# Altium PCB 30to50V-24V_10A.PcbDoc
Units mm, origin at the board's own origin, x right, y up, seen from the top; angles counter-clockwise.
Board outline 92.5 x 56.94 mm, 4 copper layers (TOP, GNG, GND, Bottom Layer), stack 1.571 mm thick; 49 components, 18 nets, 111 pads, 127 vias.
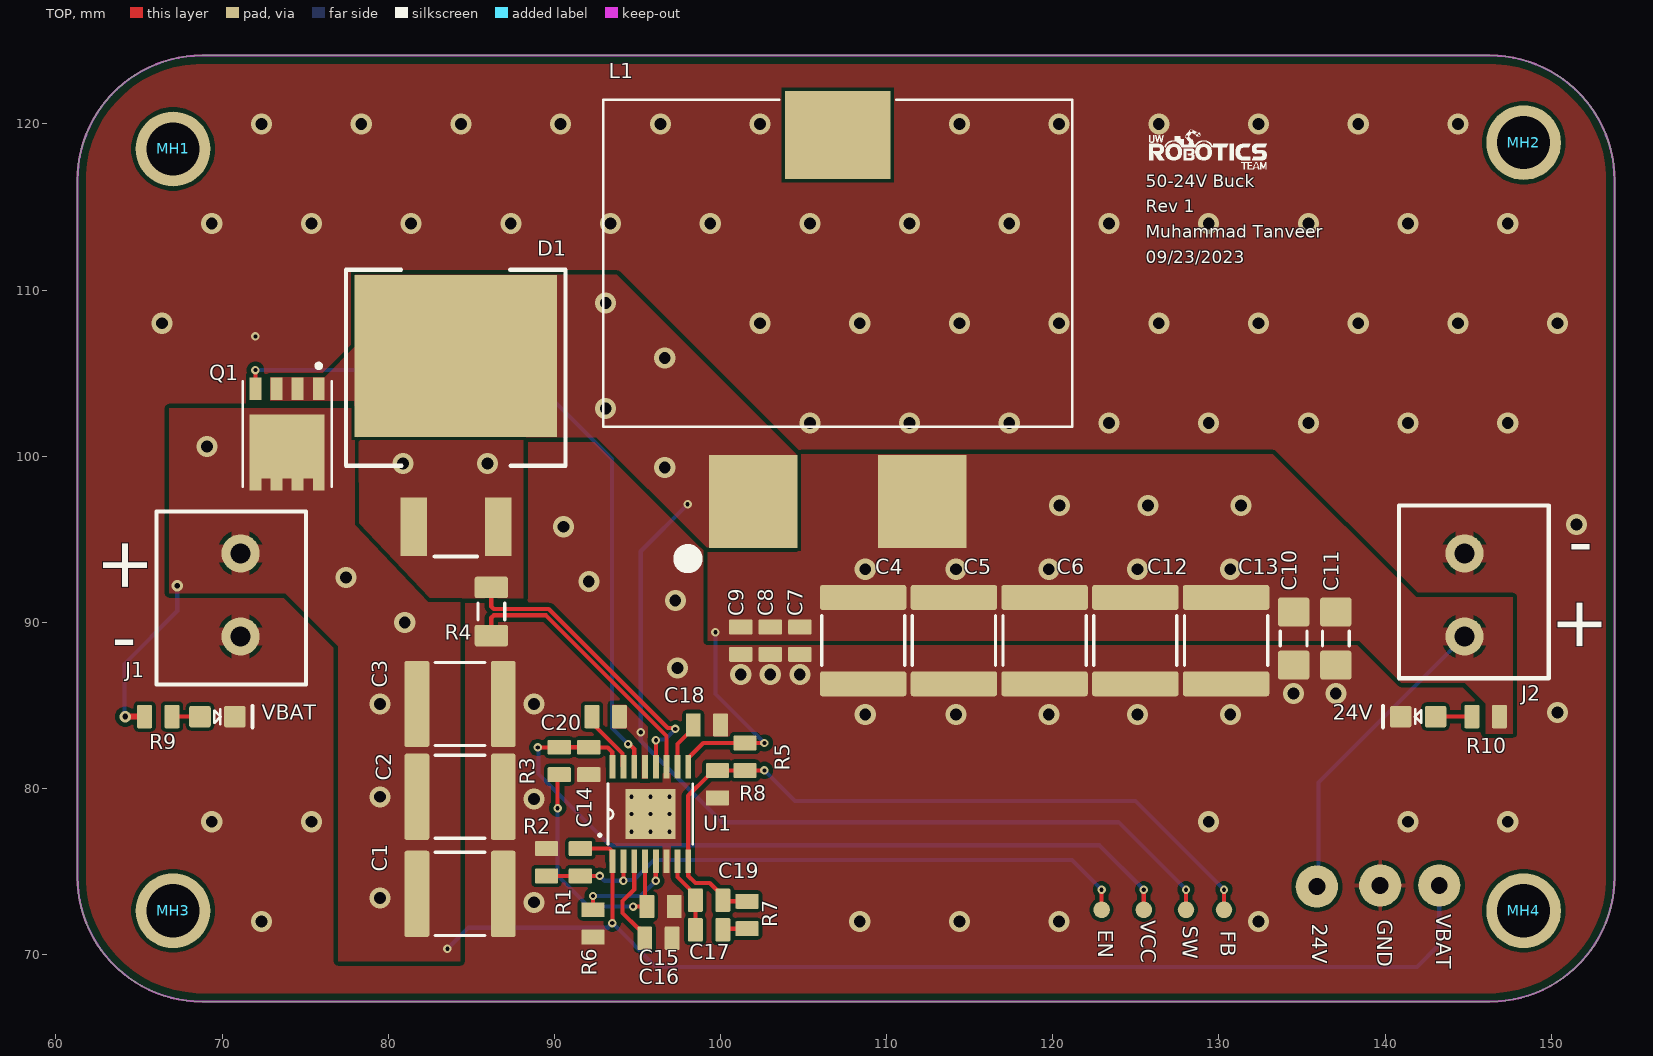
[diagram p0: TOP view]
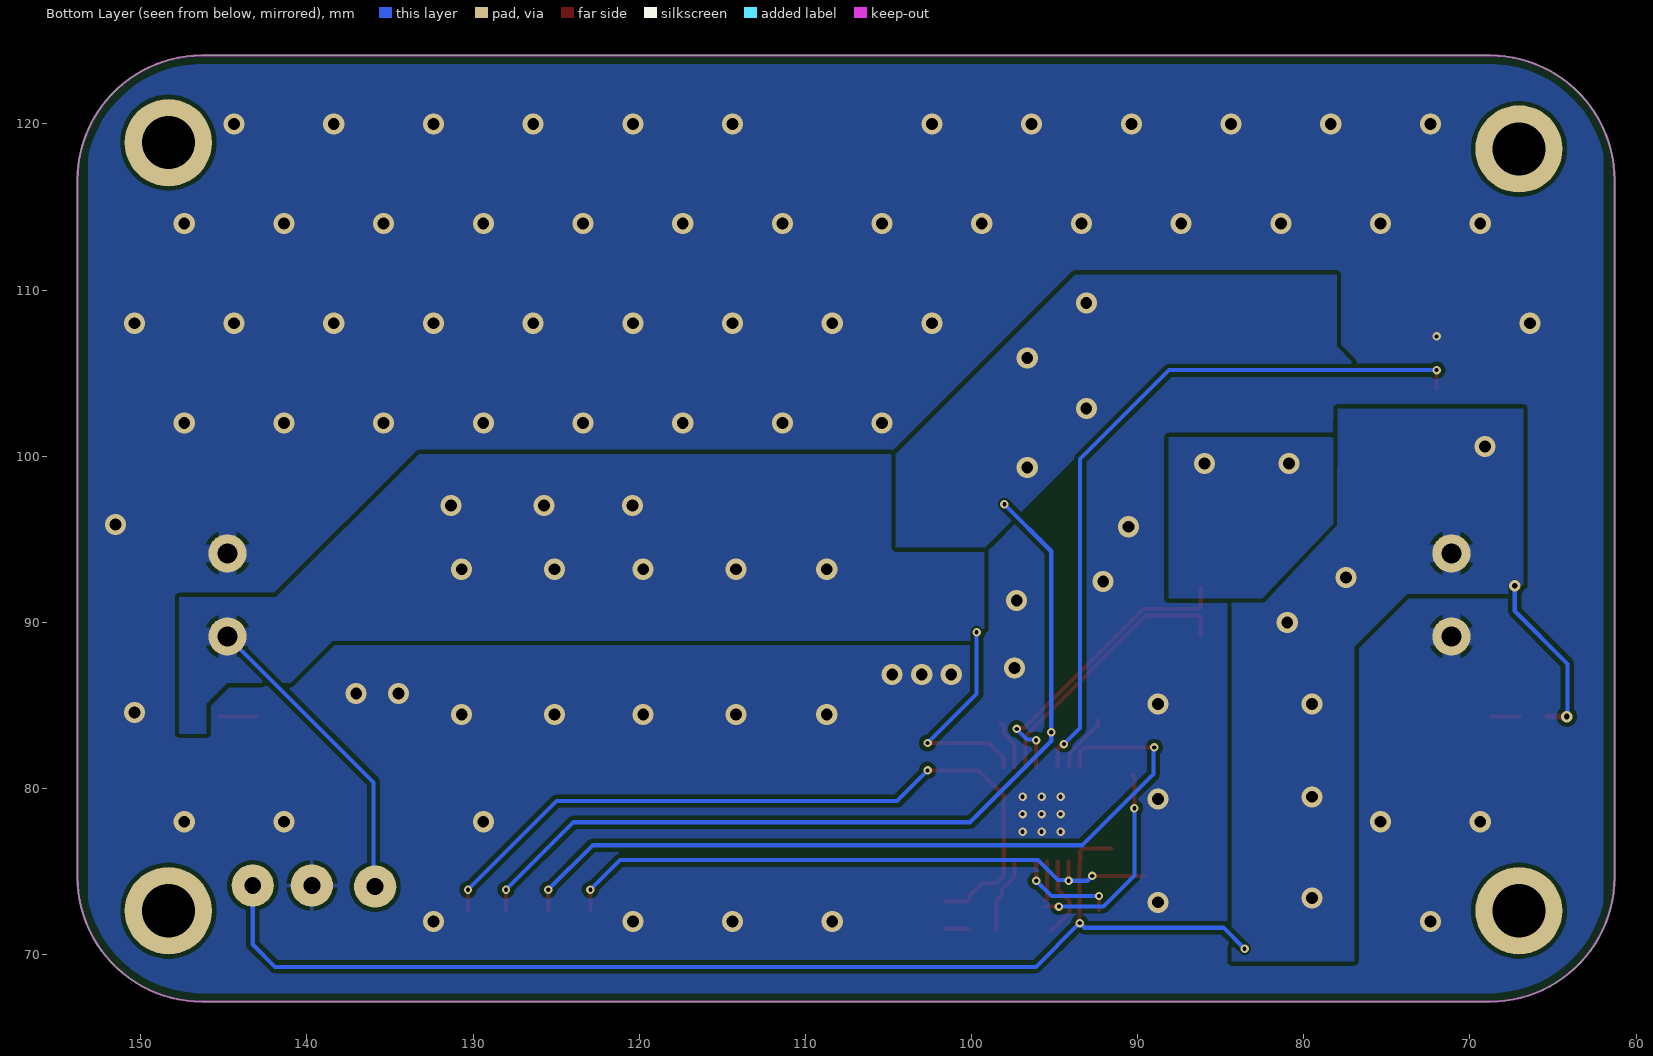
[diagram p1: Bottom Layer view, seen from below]
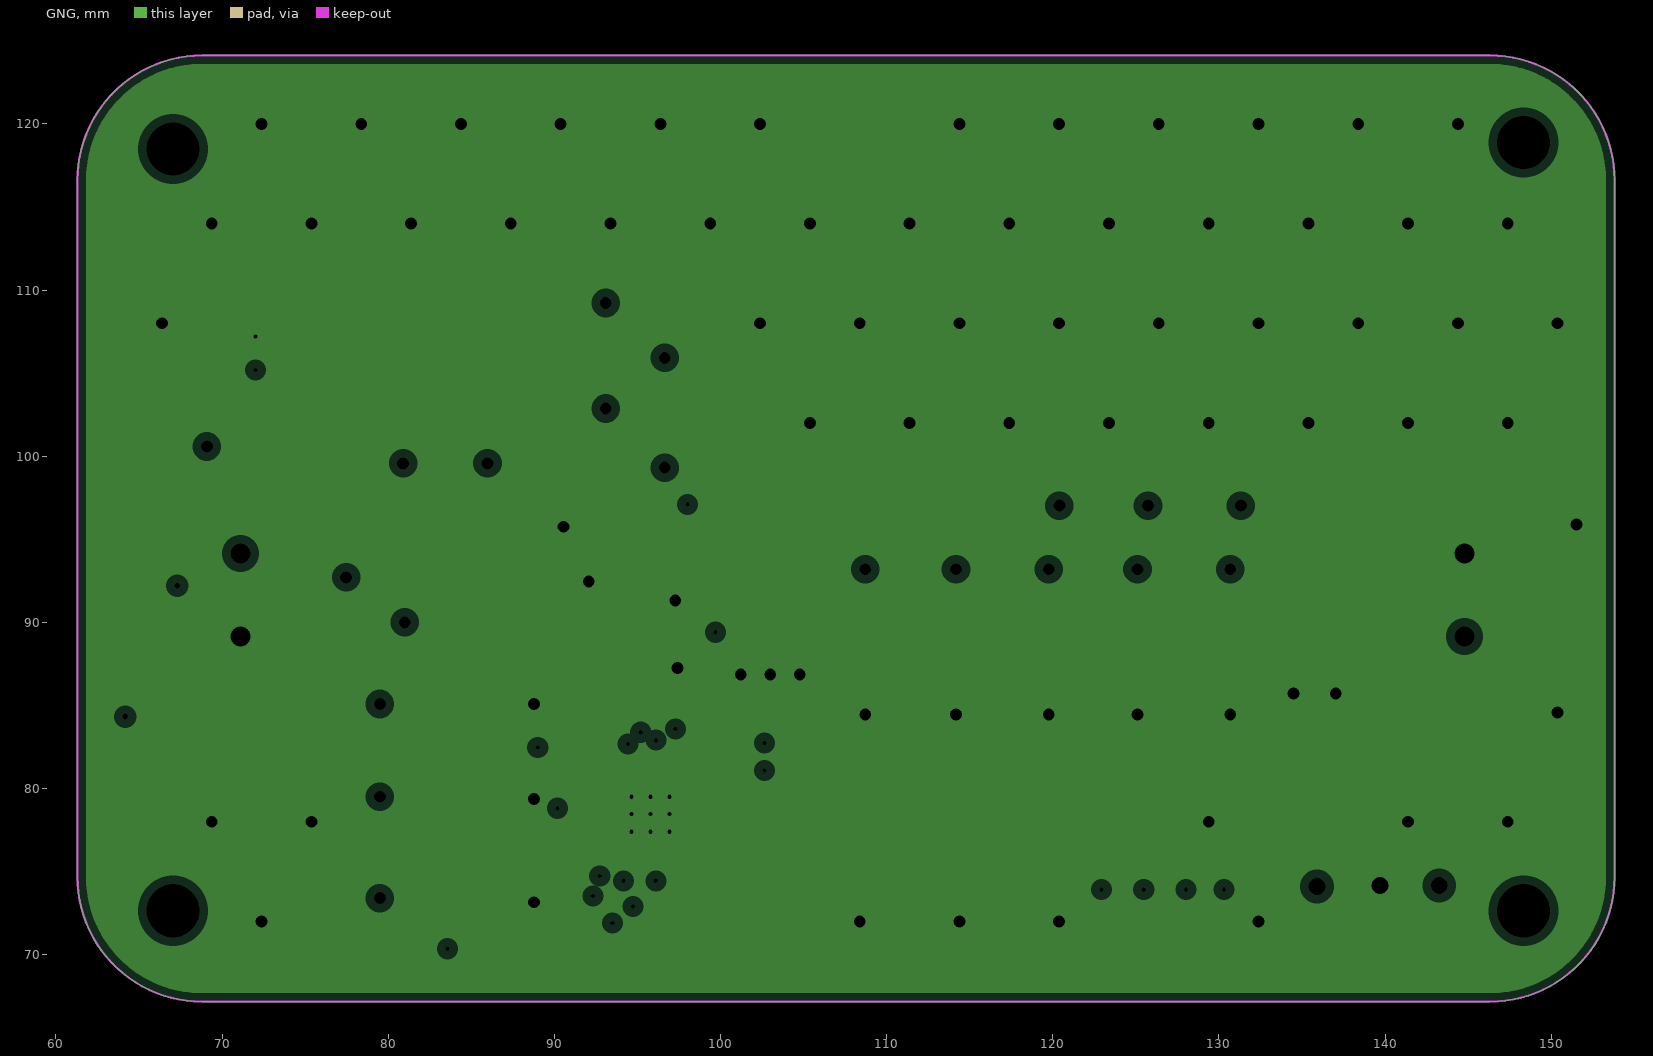
[diagram p2: GNG, clearances drawn from the general rule]
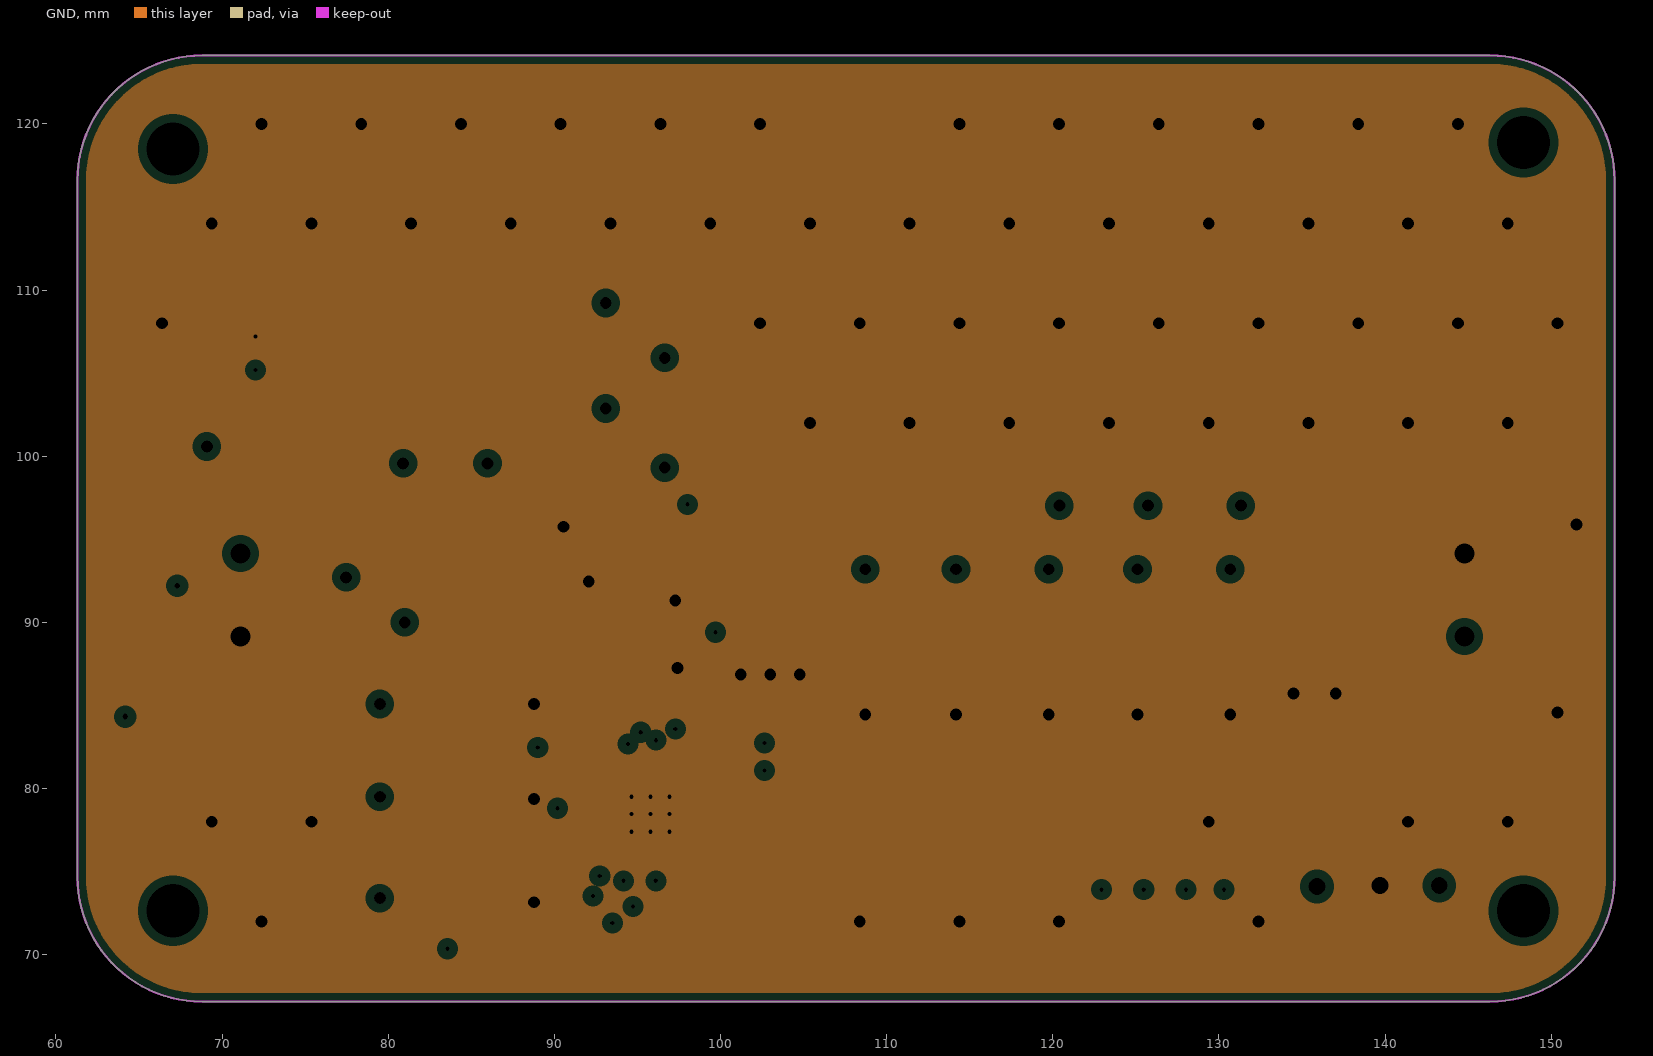
[diagram p3: GND, clearances drawn from the general rule]
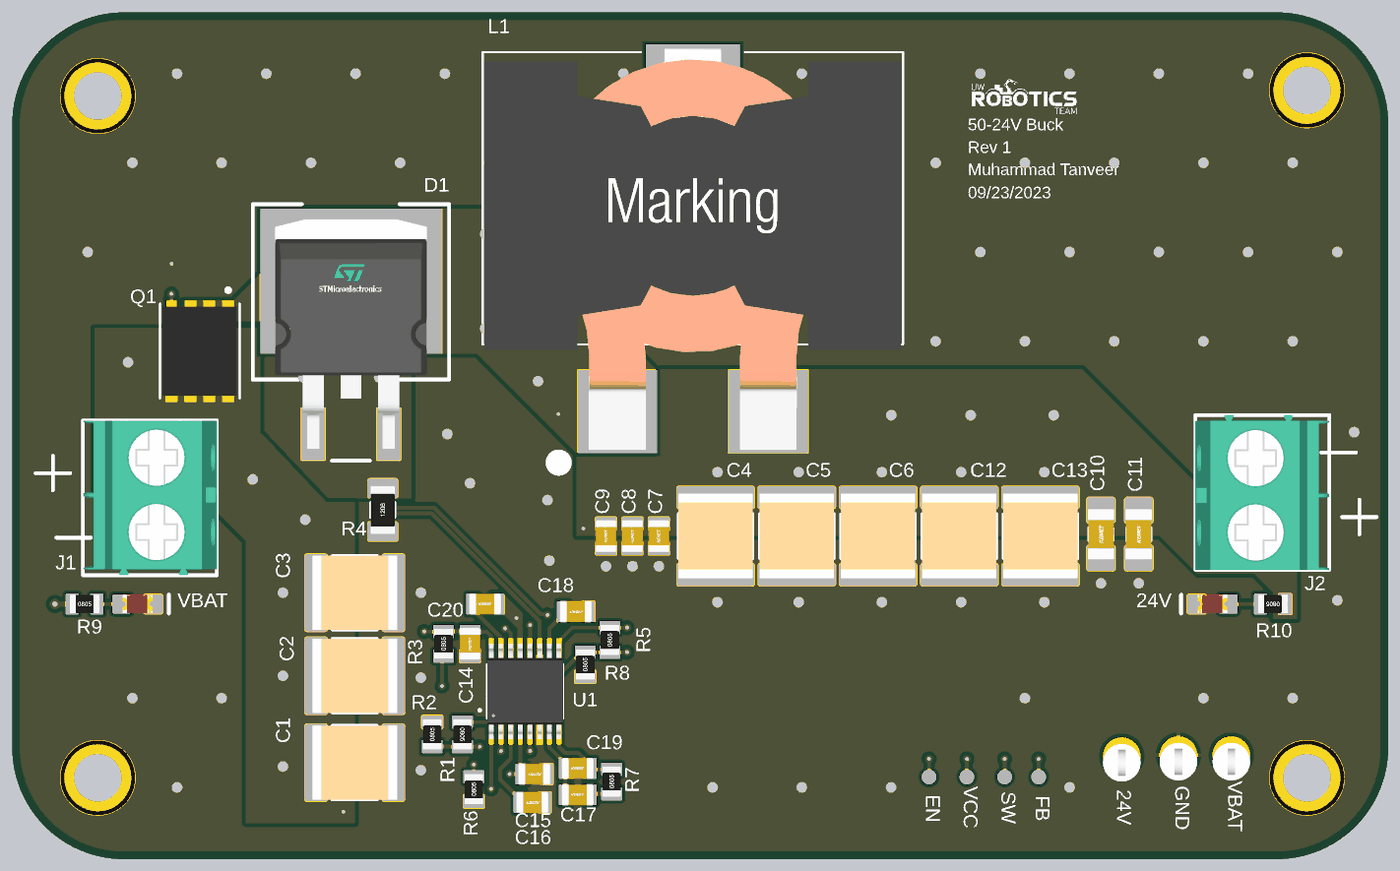
[diagram p4: 3D render of the assembled board from above, using the file's embedded part models]

## Layer stack, top to bottom
Top Solder: solder mask 0.0127, Solder Resist, Dk 3.8
TOP: signal copper 0.035
Dielectric 1: prepreg 0.2, PP-021, Dk 4.6
GNG: plane copper 0.018, net GND
Core: core 1.065, FR-4, Dk 4.6
GND: plane copper 0.018, net GND
Dielectric 2: prepreg 0.2, PP-021, Dk 4.6
Bottom Layer: signal copper 0.035
Bottom Solder: solder mask 0.0127, Solder Resist, Dk 3.8

## Board outline
68.803,67.176 cw(c68.803,74.676) 61.303,74.676 61.303,116.617 cw(c68.803,116.617) 68.803,124.117 146.304,124.117 cw(c146.304,116.617) 153.804,116.617 153.804,74.676 cw(c146.304,74.676) 146.304,67.176

## Design rules (kind name [scope] priority, off if disabled: settings)
BoardOutlineClearance [All] p1: gap=0.508 ignorepadtopadclearanceinfootprint=FALSE except(0.127: Text-OutlineEdge Text-CavityEdge Text-CutoutEdge Text-SplitBarrior Text-SplitContinuation; 0.635: Track-OutlineEdge Track-CavityEdge Track-CutoutEdge Track-SplitBarrior Track-SplitContinuation)
Clearance "High Voltage Internal" [InNetClass('High_Voltage_Internal')  and OnLayer('Power')] p1: gap=0.508 ignorepadtopadclearanceinfootprint=TRUE
Clearance "High Voltage External" [InNetClass('High_Voltage')  and OnLayer('Signal')] p2: gap=0.305 ignorepadtopadclearanceinfootprint=TRUE
Clearance Clearance_1 [All] p3: gap=0.254 ignorepadtopadclearanceinfootprint=TRUE except(0: Arc-Text Track-Text Text-Hole; 0.127: Track-Track SMDPad-SMDPad Text-Text; 0.178: SMDPad-Region; 0.203: Arc-Arc Arc-Track Arc-SMDPad Arc-Hole Track-SMDPad Track-Region Track-Hole SMDPad-THPad SMDPad-Fill SMDPad-Poly SMDPad-Text SMDPad-Hole THPad-Hole Via-Hole Fill-Hole Poly-Hole Region-Region Region-Hole; 0.508: THPad-THPad Via-Via)
ComponentClearance [All] p1: gap=0.254 collisioncheckmode=3 verticalgap=5.08 showdistances=FALSE
DiffPairsRouting [All] p1: maxlimit=0.254 minlimit=0.203 mostfreqgap=0.254 toplayer_minwidth=0.254 toplayer_maxwidth=0.254 toplayer_prefwidth=0.254 bottomlayer_minwidth=0.254 bottomlayer_maxwidth=0.254 bottomlayer_prefwidth=0.254 maxuncoupledlength=12.7
Height [All] p1: minheight=0 maxheight=1270 prefheight=12.7
HoleSize [All] p1: absolutevalues=TRUE maxlimit=5.08 minlimit=0.254 maxpercent=80.000 minpercent=20.000
HoleToHoleClearance [All] p1: gap=0.508 allowstackedmicrovias=TRUE
MinimumAnnularRing [All] p1: minimumring=0.127
MinimumSolderMaskSliver [All] p1: minsoldermaskwidth=0.076
PlaneClearance [All] p1: clearance=0.508
PlaneConnect PlaneConnect_highpwr [(InNet('24V') OR InNet('VBAT'))] p1: planeconnectstyle=Direct reliefexpansion=0.508 reliefentries=4 reliefconductorwidth=0.254 reliefairgap=0.254
PlaneConnect PlaneConnect_GNDCON [(InNet('GND') AND (InComponent('J1') OR InComponent('J2')))] p2: planeconnectstyle=Direct reliefexpansion=0.508 reliefentries=4 reliefconductorwidth=0.254 reliefairgap=0.254
PlaneConnect [All] p3: pad.planeconnectstyle=Relief pad.reliefexpansion=0.508 pad.reliefentries=4 pad.reliefconductorwidth=0.254 pad.reliefairgap=0.254 via.planeconnectstyle=Direct via.reliefexpansion=0.508 via.reliefentries=4 via.reliefconductorwidth=0.254 via.reliefairgap=0.254
PolygonConnect PolygonConnect_Via [IsVia] p1: connectstyle=Direct reliefconductorwidth=0.254 reliefentries=4 polygonreliefangle="90 Angle" airgapwidth=0.254
PolygonConnect [All] p2: connectstyle=Direct reliefconductorwidth=0.254 reliefentries=4 polygonreliefangle="90 Angle" airgapwidth=0.254
RoutingVias [All] p1: holewidth=0.305 width=0.61 viastyle="Through Hole" minholewidth=0.152 minwidth=0.305 maxholewidth=0.61 maxwidth=1.27
SilkToSilkClearance [All] p1: silktosilkclearance=0.051
SilkToSolderMaskClearance [IsPad] p1: minsilkscreentomaskgap=0.013 clearancetoexposedcopper=TRUE
SolderMaskExpansion [All] p1: expansion=0.051 istentingtop=FALSE
Width Width_1 [All] p1: maxlimit=2.54 minlimit=0.127 preferedwidth=0.254 minimp=50.000000 maximp=50.000000 favimp=50.000000
20 further rules are at their usual default settings.

## Classes and differential pairs
component class 30to50V-24V_10A: 24V C1 C2 C3 C4 C5 C6 C7 C8 C9 C10 C11 C12 C13 C14 C15 C16 C17 C18 C19 C20 D1 EN FB GND J1 J2 L1 MH1 MH2 MH3 MH4 Q1 R1 R2 R3 R4 R5 R6 R7 R8 R9 R10 SW VBAT VCC

## Components (designator, comment, footprint, x,y, rotation, side; value= is the part's Value field where it differs from the comment)
24V "TESTPOINT_LOOP" TESTPOINT_LOOP 135.89,73.66 r270 top (schematic designator TP3)
24V "LED_RED" LED_0805_RED 141.986,84.328 r180 top (schematic designator LED2)
C1 "CAP_10uF_50V_2220" CAP2220 84.328,73.66 r180 top value=10μF
C2 "CAP_10uF_50V_2220" CAP2220 84.328,79.502 r180 top value=10μF
C3 "CAP_10uF_50V_2220" CAP2220 84.328,85.09 r180 top value=10μF
C4 "CAP_47uF_35V_2220" CAP2220 108.585,88.9 r90 top value=47μF
C5 "CAP_47uF_35V_2220" CAP2220 114.046,88.9 r90 top value=47μF
C6 "CAP_47uF_35V_2220" CAP2220 119.507,88.9 r90 top value=47μF
C7 "CAP_0.1uF_50V_0805" CAP0805 104.775,88.9 r90 top value=0.1μF
C8 "CAP_1uF_50V_0805" CAP0805 102.997,88.9 r90 top value=1μF
C9 "CAP_4.7uF_50V_0805" CAP0805 101.219,88.9 r90 top value=4.7μF
C10 "CAP_NU_1206" CAP1206 134.493,89.027 r90 top value=NU
C11 "CAP_NU_1206" CAP1206 137.033,89.027 r90 top value=NU
C12 "CAP_NU_2220" CAP2220 124.968,88.9 r90 top value=NU
C13 "CAP_NU_2220" CAP2220 130.429,88.9 r90 top value=NU
C14 "CAP_1.5uF_50V_0805" CAP0805 92.075,81.661 r90 top value=1.5μF
C15 "CAP_1.8nF_50V_0805" CAP0805 96.393,72.898 r180 top value=1.8nF
C16 "CAP_10nF_16V_0805" CAP0805 96.266,70.993 r180 top value=10nF
C17 "CAP_1200pF_50V_0805" CAP0805 99.314,71.501 r0 top value=1200pF
C18 "CAP_10uF_16V_0805" CAP0805 99.187,83.82 r180 top value=10μF
C19 "CAP_47pF_50V_0805" CAP0805 99.314,73.279 r0 top value=47pF
C20 "CAP_150nF_50V_0805" CAP0805 93.091,84.328 r0 top value=150nF
D1 "DIO_SCHOTTKY_100V_20A" "D2PAK (TO-263AB) - STPS20M100SG-TR" 84.074,104.509 r0 top
EN "TESTPOINT_1MM_CIRCLE" TESTPOINT_CIRCLE_1MM 122.936,72.7 r180 top (schematic designator TP7)
FB "TESTPOINT_1MM_CIRCLE" TESTPOINT_CIRCLE_1MM 130.302,72.7 r0 top (schematic designator TP4)
GND "TESTPOINT_LOOP" TESTPOINT_LOOP 139.7,73.731 r270 top (schematic designator TP2)
J1 "CON_2POS_SCREW_TERM" 1935161 71.12,91.654 r270 top
J2 "CON_2POS_SCREW_TERM" 1935161 144.78,91.654 r90 top
L1 "IND_22uH_30A" 7443642200 107.056,111.617 r0 top
MH1 "MOUNTING_HOLE_M3_GIMBAL_REV2" MOUNTING_HOLE_3mm_GIMBAL_REV2#1 67.056,118.872 r0 top
MH2 "MOUNTING_HOLE_M3_GIMBAL_REV2" MOUNTING_HOLE_3mm_GIMBAL_REV2#2 148.336,118.872 r0 top
MH3 "MOUNTING_HOLE_M3_GIMBAL_REV2" MOUNTING_HOLE_3mm_GIMBAL_REV2#3 66.096,72.644 r0 top
MH4 "MOUNTING_HOLE_M3_GIMBAL_REV2" MOUNTING_HOLE_3mm_GIMBAL_REV2#4 148.336,73.152 r0 top
Q1 "NMOS_100V_100A" 8-VSON 73.914,101.346 r270 top
R1 "RES_49.9kΩ_0805_1%" RES0805 91.567,75.565 r270 top value=49.9kΩ
R2 "RES_2.08kΩ_0805_0.05%" RES0805 89.535,75.565 r90 top value=2.08kΩ
R3 "RES_76.8kΩ_0805_1%" RES0805 90.297,81.661 r90 top value=76.8kΩ
R4 "RES_0.007Ω_1206_1%" RES1206 86.208,90.653 r90 top value=7mΩ
R5 "RES_31.2KΩ_0805_0.1%" RES0805 101.473,81.915 r90 top value=31.2kΩ
R6 "RES_24.3kΩ_0805_1%" RES0805 92.329,71.882 r90 top value=24.3kΩ
R7 "RES_51kΩ_0805_5%" RES0805 101.6,72.39 r90 top value=51kΩ
R8 "RES_1.65KΩ_0805_0.1%" RES0805 99.822,80.264 r90 top value=1.65kΩ
R9 "RES_4.7kΩ_0805_5%" RES0805 66.167,84.328 r0 top value=4.7kΩ
R10 "RES_2.2kΩ_0805_5%" RES0805 146.05,84.328 r180 top value=2.2kΩ
SW "TESTPOINT_1MM_CIRCLE" TESTPOINT_CIRCLE_1MM 128.016,72.7 r270 top (schematic designator TP5)
U1 "LM5088" LM5088 95.783,78.461 r90 top
VBAT "TESTPOINT_LOOP" TESTPOINT_LOOP 143.256,73.731 r270 top (schematic designator TP1)
VBAT "LED_RED" LED_0805_RED 69.723,84.328 r0 top (schematic designator LED1)
VCC "TESTPOINT_1MM_CIRCLE" TESTPOINT_CIRCLE_1MM 125.476,72.7 r270 top (schematic designator TP6)

## Footprints (in the part's own frame and the unit in brackets; to place one, negate y for a bottom-side part, rotate by r counter-clockwise, add the part's x,y. Pads: shape width x height; smd on the part's side, far side on the other; paste and mask are expansions set on the pad)
8-VSON [mm]
  rect 1.372x0.71 smd paste-0.673: 1(-2.712,-1.905) 2(-2.712,1.905) 2(-2.712,-0.635) 2(-2.712,0.635) 3(2.712,1.905) 3(2.712,-0.635) 3(2.712,0.635) 3(2.712,-1.905)
  rect 3.85x4.52 smd paste-0.673: 3(0.762,0)
  silkscreen extent -4.17,-2.68 3.18,2.68, body extent -3,-2.5 3,2.5, height 1
1935161 [mm] "TERM BLK 2POS SIDE ENTRY 5MM PCB"
  round 2.3 hole 1.2: 1(-2.5,0) 2(2.5,0)
  silkscreen extent -5.01,-5.06 5.39,3.94, body extent -5.01,-5.06 5.39,3.94, height 11.41
7443642200 [mm]
  rect 5.33x5.59 smd: 1(-5.075,-14.335) 2(5.075,-14.335)
  rect 6.35x5.28 smd: 3(0,7.72)
  silkscreen extent -14.12,-17.9 14.12,9.83, body extent -14,-16.91 14,10.09, height 18.53
CAP0805 [mm] "Chip Capacitor, Body 2.0x1.2mm, Height 0.45mm, IPC Medium Density"
  rrect15% 0.9x1.4 smd: 1(-0.825,0) 2(0.825,0)
  body extent -1.1,-0.73 1.1,0.73, height 1.39
CAP1206 [mm] "Chip Capacitor, Body 3.2x1.6mm, Height 0.55mm, IPC Medium Density"
  rrect20% 1.75x1.9 smd: 1(-1.6,0) 2(1.6,0)
  silkscreen extent -0.45,-0.8 0.45,0.8, body extent -1.7,-0.9 1.7,0.9, height 0.88
CAP2220 [mm]
  rrect20% 1.5x5.2 smd: 1(-2.6,0) 2(2.6,0)
  silkscreen extent -1.5,-2.5 1.5,2.5, body extent -2.92,-2.5 2.92,2.5, height 2.4
"D2PAK (TO-263AB) - STPS20M100SG-TR" [mm] "TO-252AA"
  rect 1.6x3.5 smd: 1(-2.54,-8.751) 2(2.54,-8.751)
  rect 12.2x9.75 smd: 3(0,1.524)
  silkscreen extent -6.6,-10.54 6.6,6.71, body extent -5.1,-9.74 5.1,5.68, height 4.6
LED_0805_RED [mm] "SMD, 2-Leads, Body 2x1.25mm"
  rrect20% 1.3x1.3 smd: 1(-1.05,0) 2(1.05,0)
  silkscreen extent -0.18,-0.63 2.11,0.64, body extent -1,-0.62 1,0.63, height 1.12
LM5088 [mil]
  rect 56x14 smd paste-28: 1(-112,89.57) 2(-112,63.98) 3(-112,38.39) 4(-112,12.8) 5(-112,-12.8) 6(-112,-38.39) 7(-112,-63.98) 8(-112,-89.57) 9(112,-89.57) 10(112,-63.98) 11(112,-38.39) 12(112,-12.8) 13(112,12.8) 14(112,38.39) 15(112,63.98) 16(112,89.57)
  rect 118x118 smd paste-59: 17(0,0)
  silkscreen extent -72,-100 72,123, body extent -126,-101 126,101, height 43
MOUNTING_HOLE_3mm_GIMBAL_REV2#1 [mm] "3mm Hole"
  round 4.5 / inner round 4.5 / far side round 5.25 hole 3.2 mask+0.3: 0(0,-0.38)
MOUNTING_HOLE_3mm_GIMBAL_REV2#2 [mm] "3mm Hole"
  round 4.5 / inner round 4.5 / far side round 5.25 hole 3.2 mask+0.3: 0(0,0)
MOUNTING_HOLE_3mm_GIMBAL_REV2#3 [mm] "3mm Hole"
  round 4.5 / inner round 4.5 / far side round 5.25 hole 3.2 mask+0.3: 0(0.96,0)
MOUNTING_HOLE_3mm_GIMBAL_REV2#4 [mm] "3mm Hole"
  round 4.5 / inner round 4.5 / far side round 5.25 hole 3.2 mask+0.3: 0(0,-0.508)
RES0805 [mm] "Chip Resistor, 2-Leads, Body 2.00x1.25mm, IPC High Density"
  rrect15% 0.9x1.4 smd: 1(-0.825,0) 2(0.825,0)
  body extent -1,-0.62 1,0.63, height 0.61
RES1206 [mm] "Chip Resistor, Body 3.2x1.6mm, IPC Medium Density"
  rrect20% 1.3x2 smd: 1(-1.45,0) 2(1.45,0)
  silkscreen extent -0.5,-0.8 0.5,0.8, body extent -1.6,-0.8 1.6,0.8, height 0.61
TESTPOINT_CIRCLE_1MM [mm]
  round 1 smd: 1(0,0)
TESTPOINT_LOOP [mm]
  round 2.54 hole 1.02: 1(-0.437,0)
  body extent -1.27,-1.27 1.27,1.27, height 4.57

## Part data
24V GND VBAT: "TESTPOINT THRUHOLE", Manufacturer 1="Keystone Electronics", Manufacturer Part Number 1=5002, Package/Footprint=TH, Supplier Part Number 1=36-5002-ND, Mounting Type=TH, Supplier 1=Digi-Key
24V VBAT: "LED RED DIFFUSED 0805 SMD", Forward Voltage Drop=2V, Manufacturer 1=OSRAM, Manufacturer Part Number 1="LS R976-NR-1", Package/Footprint=0805, Supplier Part Number 1=475-1278-1-ND, Mounting Type=SMD, Supplier 1=Digi-Key
C1 C2 C3: "CAP CER 10UF 100V X7S 2220", Dielectric=X7S, Manufacturer 1="TDK Corporation", Manufacturer Part Number 1=C5750X7S2A106K230KB, Supplier Part Number 1=445-13408-1-ND, Voltage Rating=100V, Supplier 1=Digi-Key
C4 C5 C6: "CAP CER 47UF 35V X7R 2220", Manufacturer 1="TDK Corporation", Manufacturer Part Number 1=CGA9N1X7R1V476M230KC, Package/Footprint=2220, Supplier Part Number 1=445-CGA9N1X7R1V476M230KCCT-ND, Voltage Rating=35V, Mounting Type=SMD, Supplier 1=Digi-Key
C7: "CAP CER 0.1UF 50V X7R 0805", Dielectric=X7R, LCSC Part #=C49678, Manufacturer 1="Murata Electronics", Manufacturer Part Number 1=GCM21BR71H104KA37K, Package/Footprint=0805, Supplier Part Number 1=490-8049-1-ND, Voltage Rating=50V, Mounting Type=SMD, Supplier 1=Digi-Key
C8: "CAP CER 1UF 50V X7R 0805", LCSC Part #=C28323, Manufacturer 1="Samsung Electro-Mechanics", Manufacturer Part Number 1=CL21B105KBFNNNG, Package=0805, Supplier Part Number 1=1276-6470-1-ND, Voltage Rating=50V, Mounting Type=SMD, Supplier 1=Digi-Key
C9: "CAP CER 4.7UF 50V X5R 0805", Dielectric=X5R, LCSC Part #=C1779, Manufacturer 1="TDK Corporation", Manufacturer Part Number 1=CGA4J3X5R1H475K125AB, Package=0805, Supplier Part Number 1=445-7882-1-ND, Voltage Rating=50V, Mounting Type=SMD, Supplier 1=Digi-Key
C10 C11 C12 C13: "PLACEHOLDER CAPACITOR", Package=1206, Mounting Type="Surface Mount"
C14: "CAP CER 1.5UF 50V X7R 0805", Dielectric=X7R, Manufacturer 1="TDK Corporation", Manufacturer Part Number 1=C2012X7R1H155K125AC, Voltage Rating=50V, Supplier 1=Digi-Key, Supplier Part Number 1=C2012X7R1H155K125AC
C15: "CAP CER 1800PF 50V C0G/NP0 0805", Dielectric=C0G, Manufacturer 1="Murata Electronics", Manufacturer Part Number 1=GRM2165C1H182JA01D, Supplier Part Number 1=490-1626-1-ND, Voltage Rating=50V, Supplier 1=Digi-Key
C16: "CAP CER 10000PF 16V X7R 0805", Manufacturer 1=Yageo, Manufacturer Part Number 1=AC0805KRX7R7BB103, Supplier Part Number 1=311-3161-1-ND, Voltage Rating=16V, Supplier 1=Digi-Key
C17: "CAP CER 1200PF 50V X7R 0805", Manufacturer 1=KEMET, Manufacturer Part Number 1=C0805C122K5RAC7800, Package/Footprint=0805, Supplier Part Number 1=399-C0805C122K5RAC7800CT-ND, Voltage Rating=50V, Supplier 1=Digi-Key
C18: "CAP CER 10UF 16V X5R 0805", Dielectric=X5R, Manufacturer 1=Yageo, Manufacturer Part Number 1=CC0805KKX5R7BB106, Package/Footprint=0805, Supplier Part Number 1=311-1865-1-ND, Voltage Rating=16V, Mounting Type=SMD, Supplier 1=Digi-Key
C19: "CAP CER 47PF 50V C0G/NPO 0805", Dielectric=C0G, Manufacturer 1=YAGEO, Manufacturer Part Number 1=CC0805JRNPO9BN470, Package/Footprint=0805, Supplier Part Number 1=311-1107-1-ND, Voltage Rating=50V, Mounting Type=SMD, Supplier 1=Digi-Key
C20: "CAP CER 0.15UF 50V X7R 0805", Dielectric=X7R, Manufacturer 1="Murata Electronics", Manufacturer Part Number 1=CC0603KRX7R9BB154, Supplier Part Number 1=GRM21BR71H154KA01L, Voltage Rating=50V, Supplier 1=Digi-Key
D1: "DIODE SCHOTTKY 100V 20A D2PAK", Forward Current=20A, Manufacturer 1=STMicroelectronics, Manufacturer Part Number 1=STPS20M100SG-TR, Package/Footprint=TO-263AB, Supplier Part Number 1=497-10993-1-ND, Mounting Type=SMD, Supplier 1=Digi-Key, Vr (Max)=100V
EN FB SW VCC: "TESTPOINT 1MM CIRCLE"
J1 J2: "TERM BLK 2POS SIDE ENTRY 5MM", Manufacturer 1="Phoenix Contact", Manufacturer Part Number 1=1935161, Package/Footprint=SMD, Supplier Part Number 1=277-1667-ND, Mounting Type=TH, Supplier 1=Digi-Key
L1: "FIXED IND 22UH 30A 2.4 MOHM SMD", Current Rating=30A, DC Resistance (DCR)=2.4mR, Inductance=22μH, Inductance Tolerance=15%, Manufacturer 1="Würth Elektronik", Manufacturer Part Number 1=7443642200, Supplier Part Number 1=732-5628-ND, Mounting Type=SMD, Saturation Current=30A, Supplier 1=Digi-Key
MH1 MH2 MH3 MH4: "MOUNTING_HOLE_M3 Gimbal Rev2"
Q1: "MOSFET N-CH 100V 100A 8VSON", Manufacturer 1="Texas Instruments", Manufacturer Part Number 1=CSD19532Q5B, Package/Footprint=8-VSON-CLIP, Supplier Part Number 1=296-37478-1-ND, Id=100A, Mounting Type=SMD, Supplier 1=Digi-Key, Vdss=100V, Vgs (Max)=±20V
R1: "RES 49.9K OHM 1% 1/8W 0805", LCSC Part #=C17719, Manufacturer 1="Vishay Dale", Manufacturer Part Number 1=TNPW080549K9BEEN, Package/Footprint=0805, Supplier Part Number 1=541-3802-1-ND, Mounting Type=SMD, Supplier 1=Digi-Key
R2: "RES 2.08K OHM 0.05% 1/8W 0805", Manufacturer 1="KOA Speer Electronics, Inc.", Manufacturer Part Number 1=RN73R2ATTD2081A10, Package/Footprint=0805, Supplier Part Number 1=2019-RN73R2ATTD2081A10CT-ND, Mounting Type=SMD, Supplier 1=Digi-Key
R3: "RES 76.8K OHM 1% 1/8W 0805", Manufacturer 1=Yageo, Manufacturer Part Number 1=RC0805FR-0776K8L, Supplier Part Number 1=311-76.8KCRCT-ND, Supplier 1=Digi-Key
R4: "RES 0.007 OHM 1% 1W 1206", Manufacturer 1="Rohm Semiconductor", Manufacturer Part Number 1=PMR18EZPFU7L00, Package/Footprint=1206, Supplier Part Number 1=RHM.007ALCT-ND, Mounting Type=SMD, Supplier 1=Digi-Key
R5: "RES 31.2K OHM 0.1% 1/8W 0805", Manufacturer 1=Yageo, Manufacturer Part Number 1=RT0805BRD0731K2L, Package=0805, Supplier Part Number 1=13-RT0805BRD0731K2LCT-ND, Mounting Type=SMD, Supplier 1=Digi-Key
R6: "RES 24.3K OHM 1% 1/8W 0805", Manufacturer 1=YAGEO, Manufacturer Part Number 1=RC0805FR-0724K3L, Package=0805, Power=0.125W, Tolerance=1%, Supplier 1="Future Electronics"
R7: "RES 51K OHM 1% 1/8W 0805", Manufacturer 1="Vishay Dale", Manufacturer Part Number 1=CRCW080551K0FKEA, Supplier Part Number 1=541-51.0KCCT-ND, Supplier 1=Digi-Key
R8: "RES 1.65K OHM 0.1% 1/4W 0805", Manufacturer 1="KOA Speer Electronics, Inc.", Manufacturer Part Number 1=RS73F2ATTD1651B, Package=0805, Supplier Part Number 1=2019-RS73F2ATTD1651BCT-ND, Mounting Type=SMD, Supplier 1=Digi-Key
R9: "RES 4.7K OHM 5% 1/8W 0805", LCSC Part #=C17673, Manufacturer 1=Yageo, Manufacturer Part Number 1=RC0805JR-074K7L, Package=0805, Supplier Part Number 1=311-4.7KARCT-ND, Mounting Type=SMD, Supplier 1=Digi-Key
R10: "RES 2.2K OHM 5% 1/8W 0805", Manufacturer 1="Vishay Dale", Manufacturer Part Number 1=CRCW08052K20JNEAC, Package=0805, Supplier Part Number 1=541-4169-1-ND, Tolerance=5%, Supplier 1=Digi-Key
U1: library part LM5088MHX-2/NOPB, "IC REG CTRLR BUCK 16HTSSOP", Manufacturer 1="Texas Instruments", Package=16-HTSSOP, Supplier Part Number 1=296-35302-1-ND, Supply Voltage="4.5V - 75V", Switching Frequency="50kHz - 1MHz", Manufacturer Part Number 1=LM5088MHX-2/NOPB, Supplier 1=Digi-Key

## Via types
v1: diameter 1.27, hole 0.711, TOP to Bottom Layer, tented both sides, 93 vias
v2: diameter 0.508, hole 0.254, TOP to Bottom Layer, tented both sides, 32 vias
v3: diameter 0.7, hole 0.35, TOP to Bottom Layer, tented both sides, 2 vias

## Nets (pads, with @x,y where several pads share a name; then routed paths per layer and width w, separated by ;. In a path a pad name is that pad's centre, name@x,y a point inside that pad or via, vN(x,y) a via of type N, cw(c..) or ccw(c..) an arc to the next point about the centre after c; other vN are vias at no path point)
24V: 24V.1@135.89,74.097 C4.2 C5.2 C6.2 C7.2 C8.2 C9.2 C10.2 C11.2 C12.2 C13.2 J2.1 L1.2 R5.2 R10.1 U1.9 | length 32.4
  TOP w0.254: U1.9 98.058,81.839 98.96,82.74 R5.2@101.346,82.74 ; R5.2 v2(102.642,82.74)
  Bottom Layer w0.254: v2(99.695,89.408) 99.695,85.687 v2(102.642,82.74) ; 24V.1@135.992,73.66 135.992,80.366 J2.1
  other v1: 108.712,93.2 114.173,93.2 119.761,93.2 125.095,93.2 130.683,93.2 120.396,97.028 125.73,97.028 131.318,97.028
BOOT: C20.1 U1.15 | length 3.5
  TOP w0.254: C20.1@92.393,84.074 92.393,83.824 92.716,83.501 92.72,83.501 94.108,82.113 94.108,81.356 U1.15
COMP: C17.1 C19.1 U1.7 | length 4.6
  TOP w0.254: U1.7 97.408,74.677 98.166,73.919 98.166,73.602 C19.1 C17.1
CS: D1.1 D1.2 R4.2 U1.12 | length 18.3
  TOP w0.254: R4.2 86.208,90.954 86.356,90.805 89.662,90.805 96.827,83.64 97.233,83.64 v2(97.282,83.591) ; U1.12 96.112,81.309 v2(96.112,82.911)
  Bottom Layer w0.254: v2(96.112,82.911) 96.161,82.959 96.65,82.959 v2(97.282,83.591)
  other v1: 80.899,99.568 85.979,99.568
EN: EN.1 R1.2 R2.1 U1.2 | length 37.2
  TOP w0.254: R2.1 R1.2 v2(92.736,74.74) ; v2(94.158,74.447) U1.2 ; EN.1 v2(122.936,73.914)
  Bottom Layer w0.254: v2(92.736,74.74) 93.028,74.447 v2(94.158,74.447) 94.201,74.489 94.793,74.489 95.996,75.692 121.158,75.692 v2(122.936,73.914)
FB: C19.2 FB.1 R5.1 R7.2 R8.2 U1.8 | length 46.1
  TOP w0.254: U1.8@98.058,75.582 98.058,74.742 98.491,74.309 99.356,74.309 99.814,73.852 99.816,73.852 100.139,73.529 C19.2 100.203,73.215 R7.2 ; U1.8 98.058,79.571 99.249,80.761 99.249,80.766 99.572,81.089 R8.2 R5.1@101.345,81.09 ; R5.1 v2(102.642,81.09) ; FB.1 v2(130.302,73.914)
  Bottom Layer w0.254: v2(102.642,81.09) 104.484,79.248 124.968,79.248 v2(130.302,73.914)
GND: 24V.2 C1.1 C2.1 C3.1 C4.1 C5.1 C6.1 C7.1 C8.1 C9.1 C10.1 C11.1 C12.1 C13.1 C14.1 C15.1 C16.1 C18.1 GND.1 J1.2 J2.2 R2.2 R4.1 R6.1 R8.1 U1.6 U1.11 U1.17 VBAT.2 | length 16.6
  TOP w0.254: R4.1 86.208,90.275 86.356,90.424 89.504,90.424 96.758,83.17 U1.11
  other v1: 72.381,72 108.381,72 114.381,72 120.381,72 132.381,72 88.773,73.152 69.381,78 75.381,78 129.381,78 141.381,78 147.381,78 88.773,79.375 108.712,84.455 114.173,84.455 119.761,84.455 125.095,84.455 130.683,84.455 150.381,84.582 88.773,85.09 134.493,85.725 137.033,85.725 101.219,86.868 102.997,86.868 104.775,86.868 97.409,87.249 97.282,91.313 92.075,92.456 90.551,95.758 151.511,95.885 105.381,102 111.381,102 117.381,102 123.381,102 129.381,102 135.381,102 141.381,102 147.381,102 66.381,108 102.381,108 108.381,108 114.381,108 120.381,108 126.381,108 132.381,108 138.381,108 144.381,108 150.381,108 69.381,114 75.381,114 81.381,114 87.381,114 93.381,114 99.381,114 105.381,114 111.381,114 117.381,114 123.381,114 129.381,114 135.381,114 141.381,114 147.381,114 72.381,120 78.381,120 84.381,120 90.381,120 96.381,120 102.381,120 114.381,120 120.381,120 126.381,120 132.381,120 138.381,120 144.381,120
  other v2: 94.64,77.394 95.783,77.394 96.926,77.394 94.64,78.461 95.783,78.461 96.926,78.461 94.64,79.502 95.783,79.502 96.926,79.502 72.009,107.213
HG: Q1.1 U1.14 | length 43.9
  TOP w0.254: Q1.1 v2(72.009,105.181) ; v2(94.441,82.678) 94.508,82.678 94.808,82.378 U1.14
  Bottom Layer w0.254: v2(72.009,105.181) 88.113,105.181 93.472,99.822 93.472,83.647 v2(94.441,82.678)
NetC17_2: C17.2 R7.1 | length 1.5
  TOP w0.254: C17.2 100.203,71.565 R7.1
NetLED1_1: R9.2 VBAT.1@68.673,84.328 | length 1.7
  TOP w0.254: R9.2 VBAT.1@68.673,84.328
NetLED2_1: 24V.1@143.036,84.328 R10.2 | length 2.2
  TOP w0.254: 24V.1@143.036,84.328 R10.2
RAMP: C15.2 R3.1 U1.4 | length 14.6
  TOP w0.254: v2(90.196,78.816) 90.196,80.735 R3.1 ; v2(94.742,72.898) C15.2 ; C15.2@95.458,73.296 U1.4 ; C15.2@95.568,73.279 C15.2@95.585,73.296
  Bottom Layer w0.254: v2(90.196,78.816) 90.196,74.768 92.066,72.898 v2(94.742,72.898)
RES: C18.2 U1.10 | length 3
  TOP w0.254: U1.10 97.408,82.676 98.038,83.306 98.038,83.751 C18.2@98.234,83.947
RT: R6.2 U1.5 | length 6.2
  TOP w0.254: R6.2 v2(92.329,73.533) ; v2(96.108,74.447) U1.5
  Bottom Layer w0.254: v2(92.329,73.533) 95.194,73.533 v2(96.108,74.447)
SS: C16.2 U1.3 | length 5
  TOP w0.254: U1.3 94.808,73.929 94.107,73.227 94.107,72.517 95.058,71.566 95.118,71.566 C16.2@95.248,71.436
SW: C20.2 D1.3 L1.1 Q1.2 SW.1 U1.13 | length 53.2
  TOP w0.254: SW.1 v2(128.016,73.914)
  Bottom Layer w0.254: v2(98.019,97.104) 95.199,94.285 95.199,82.855 100.076,77.978 123.952,77.978 v2(128.016,73.914)
  other v1: 96.647,99.314 93.091,102.87 96.647,105.918 93.091,109.22
  other v2: 95.199,83.388
VBAT: C1.2 C2.2 C3.2 J1.1 Q1.3 R1.1 R9.1 U1.1 VBAT.1@143.256,74.168 | length 82
  TOP w0.254: R1.1 93.307,76.39 93.458,76.24 93.458,75.667 U1.1 93.508,71.918 v2(93.49,71.9)
  TOP w0.356: v3(64.173,84.328) R9.1 ; J1.1@71.097,94.13 J1.1
  Bottom Layer w0.254: v3@64.135,84.252 64.135,87.503 67.31,90.678 v3(67.31,92.202) ; J1.1@71.109,94.143 J1.1 ; v2(83.566,70.358) 84.836,71.628 93.214,71.628 93.487,71.9 v2(93.49,71.9) 96.125,69.266 141.91,69.266 143.256,70.612 VBAT.1@143.256,73.787
  other v1: 79.502,73.406 79.502,79.502 79.502,85.09 81,90 77.47,92.71 69.088,100.584
VCC: C14.2 R3.2 U1.16 VCC.1 | length 47.7
  TOP w0.254: v2(89.002,82.474) 90.285,82.474 R3.2 C14.2 92.094,82.467 93.214,82.467 93.482,82.199 93.482,81.332 U1.16 ; VCC.1 v2(125.476,73.914)
  Bottom Layer w0.254: v2(89.002,82.474) 89.05,82.425 89.05,80.876 93.345,76.581 122.809,76.581 v2(125.476,73.914)
pads on no net: L1.3 MH1.0 MH2.0 MH3.0 MH4.0

## Polygon pours and split planes (outlines as drawn)
GND on Bottom Layer "GND_L04_P023" (solid, remove dead copper, pour order 23): 61.976,123.698 153.162,123.698 153.162,67.564 62.992,67.564 61.976,68.58 61.976,100.584
24V on Bottom Layer "TOP-OUT" (solid, remove dead copper, pour order 18): 133.248,100.127 104.623,100.127 104.623,94.234 99.238,94.234 99.238,88.9 138.43,88.9 140.97,86.36 144.78,86.36 146.05,85.09 146.05,83.312 147.676,83.312 147.676,91.516 141.859,91.516
VBAT on Bottom Layer "TOP-VBAT" (solid, remove dead copper, pour order 10): 66.802,91.719 73.787,91.719 76.962,88.544 76.962,69.596 84.328,69.596 84.328,89.125 84.328,91.186 82.39,91.186 82.385,91.181 77.978,95.845 77.953,102.87 66.802,102.87
SW on Bottom Layer "SW_L04_P008" (solid, remove dead copper, pour order 8): 93.771,110.922 104.572,100.127 104.572,94.513 99.162,94.513 98.806,94.869 92.532,101.143 77.978,101.143 77.978,103.353 72.898,103.353 72.898,104.75 76.175,104.75 78.029,106.604 78.029,110.922
CS on Bottom Layer "TOP-CS" (solid, remove dead copper, pour order 15): 78.003,95.707 82.271,91.44 88.138,91.44 88.138,101.143 78.003,101.143
GND on TOP "GND_L01_P029" (solid, remove dead copper, pour order 29): 61.303,124.117 153.804,124.117 153.804,67.176 63.38,67.176 61.303,69.253
24V on TOP "TOP-OUT" (solid, pour order 28): 133.248,100.127 104.623,100.127 104.623,94.234 99.238,94.234 99.238,88.9 138.43,88.9 140.97,86.36 144.78,86.36 146.05,85.09 146.05,83.312 147.676,83.312 147.676,91.516 141.859,91.516
VBAT on TOP "TOP-VBAT" (solid, pour order 25): 66.825,91.743 73.81,91.743 76.985,88.568 76.985,69.596 84.351,69.596 84.351,89.148 84.351,91.209 82.413,91.209 82.408,91.205 78.001,95.868 77.976,102.893 66.825,102.893
SW on TOP "SW_L01_P027" (solid, remove dead copper, pour order 27): 93.771,110.922 104.572,100.127 104.572,94.513 99.162,94.513 98.806,94.869 92.532,101.143 77.978,101.143 77.978,103.353 72.898,103.353 72.898,104.75 76.175,104.75 78.029,106.604 78.029,110.922
CS on TOP "TOP-CS" (solid, pour order 26): 78.003,95.707 82.271,91.44 88.138,91.44 88.138,101.143 78.003,101.143
SW on TOP "SW_L01_P021" (solid, pour order 21): 93.472,85.039 93.472,83.617 94.336,83.617 95.275,82.677 95.275,80.594 95.631,80.594 95.631,83.718 94.31,85.039
GND on GND (split plane): 146.67,123.599 147.035,123.57 147.398,123.522 147.758,123.456 148.114,123.37 148.465,123.266 148.81,123.144 149.148,123.004 149.478,122.846 149.8,122.672 150.112,122.481 150.414,122.273 150.704,122.05 150.982,121.813 151.248,121.561 151.5,121.295 151.738,121.017 151.961,120.726 152.168,120.425 152.359,120.113 152.534,119.791 152.691,119.461 152.831,119.122 152.954,118.777 153.058,118.426 153.143,118.07 153.21,117.71 153.258,117.348 153.286,116.983 153.295,116.635 153.294,116.617 153.294,74.676 153.295,74.657 153.286,74.31 153.258,73.945 153.21,73.582 153.143,73.222 153.058,72.866 152.954,72.515 152.831,72.17 152.691,71.832 152.534,71.502 152.359,71.18 152.168,70.868 151.961,70.566 151.738,70.276 151.5,69.998 151.248,69.732 150.982,69.48 150.704,69.242 150.414,69.019 150.112,68.812 149.8,68.621 149.478,68.446 149.148,68.289 148.81,68.149 148.465,68.026 148.114,67.922 147.758,67.837 147.398,67.77 147.035,67.722 146.67,67.694 146.323,67.685 146.304,67.686 68.803,67.686 68.785,67.685 68.437,67.694 68.072,67.722 67.71,67.77 67.35,67.837 66.994,67.922 66.643,68.026 66.298,68.149 65.959,68.289 65.629,68.446 65.307,68.621 64.995,68.812 64.694,69.019 64.403,69.242 64.125,69.48 63.859,69.732 63.607,69.998 63.37,70.276 63.147,70.566 62.939,70.868 62.748,71.18 62.574,71.502 62.416,71.832 62.276,72.17 62.154,72.515 62.05,72.866 61.964,73.222 61.898,73.582 61.85,73.945 61.821,74.31 61.812,74.657 61.814,74.676 61.814,116.617 61.812,116.635 61.821,116.983 61.85,117.348 61.898,117.71 61.964,118.07 62.05,118.426 62.154,118.777 62.276,119.122 62.416,119.461 62.574,119.791 62.748,120.113 62.939,120.425 63.147,120.726 63.37,121.017 63.607,121.295 63.859,121.561 64.125,121.813 64.403,122.05 64.694,122.273 64.995,122.481 65.307,122.672 65.629,122.846 65.959,123.004 66.298,123.144 66.643,123.266 66.994,123.37 67.35,123.456 67.71,123.522 68.072,123.57 68.437,123.599 68.785,123.608 68.803,123.606 146.304,123.606 146.323,123.608
GND on GNG (split plane): 146.67,123.599 147.035,123.57 147.398,123.522 147.758,123.456 148.114,123.37 148.465,123.266 148.81,123.144 149.148,123.004 149.478,122.846 149.8,122.672 150.112,122.481 150.414,122.273 150.704,122.05 150.982,121.813 151.248,121.561 151.5,121.295 151.738,121.017 151.961,120.726 152.168,120.425 152.359,120.113 152.534,119.791 152.691,119.461 152.831,119.122 152.954,118.777 153.058,118.426 153.143,118.07 153.21,117.71 153.258,117.348 153.286,116.983 153.295,116.635 153.294,116.617 153.294,74.676 153.295,74.657 153.286,74.31 153.258,73.945 153.21,73.582 153.143,73.222 153.058,72.866 152.954,72.515 152.831,72.17 152.691,71.832 152.534,71.502 152.359,71.18 152.168,70.868 151.961,70.566 151.738,70.276 151.5,69.998 151.248,69.732 150.982,69.48 150.704,69.242 150.414,69.019 150.112,68.812 149.8,68.621 149.478,68.446 149.148,68.289 148.81,68.149 148.465,68.026 148.114,67.922 147.758,67.837 147.398,67.77 147.035,67.722 146.67,67.694 146.323,67.685 146.304,67.686 68.803,67.686 68.785,67.685 68.437,67.694 68.072,67.722 67.71,67.77 67.35,67.837 66.994,67.922 66.643,68.026 66.298,68.149 65.959,68.289 65.629,68.446 65.307,68.621 64.995,68.812 64.694,69.019 64.403,69.242 64.125,69.48 63.859,69.732 63.607,69.998 63.37,70.276 63.147,70.566 62.939,70.868 62.748,71.18 62.574,71.502 62.416,71.832 62.276,72.17 62.154,72.515 62.05,72.866 61.964,73.222 61.898,73.582 61.85,73.945 61.821,74.31 61.812,74.657 61.814,74.676 61.814,116.617 61.812,116.635 61.821,116.983 61.85,117.348 61.898,117.71 61.964,118.07 62.05,118.426 62.154,118.777 62.276,119.122 62.416,119.461 62.574,119.791 62.748,120.113 62.939,120.425 63.147,120.726 63.37,121.017 63.607,121.295 63.859,121.561 64.125,121.813 64.403,122.05 64.694,122.273 64.995,122.481 65.307,122.672 65.629,122.846 65.959,123.004 66.298,123.144 66.643,123.266 66.994,123.37 67.35,123.456 67.71,123.522 68.072,123.57 68.437,123.599 68.785,123.608 68.803,123.606 146.304,123.606 146.323,123.608

## Keep-outs
Keep-Out Layer:
  the board outline again, w0.127

## Silkscreen, mask and mechanical layers (free items; w line width, h text height)
Top Overlay:
  drawing of 16 lines, arcs and shapes, not listed
  text "50-24V Buck" at 125.593,115.926 h1.27
  text "Rev 1" at 125.593,114.402 h1.27
  text "Muhammad Tanveer" at 125.593,112.878 h1.27
  text "09/23/2023" at 125.593,111.354 h1.27

## Text inside footprints (layer, text, board x,y; h text height)
J1: Top Overlay "+" at 62.865,95.185 h3.05 r270; Top Overlay "-" at 63.373,87.616 h3.05
J2: Top Overlay "-" at 152.527,95.692 h3.05 r180; Top Overlay "+" at 153.035,88.123 h3.05 r90